# EAGLE board ATTiny Fuse Reset with 12V Charge Pump (EAGLE 7.5.0)
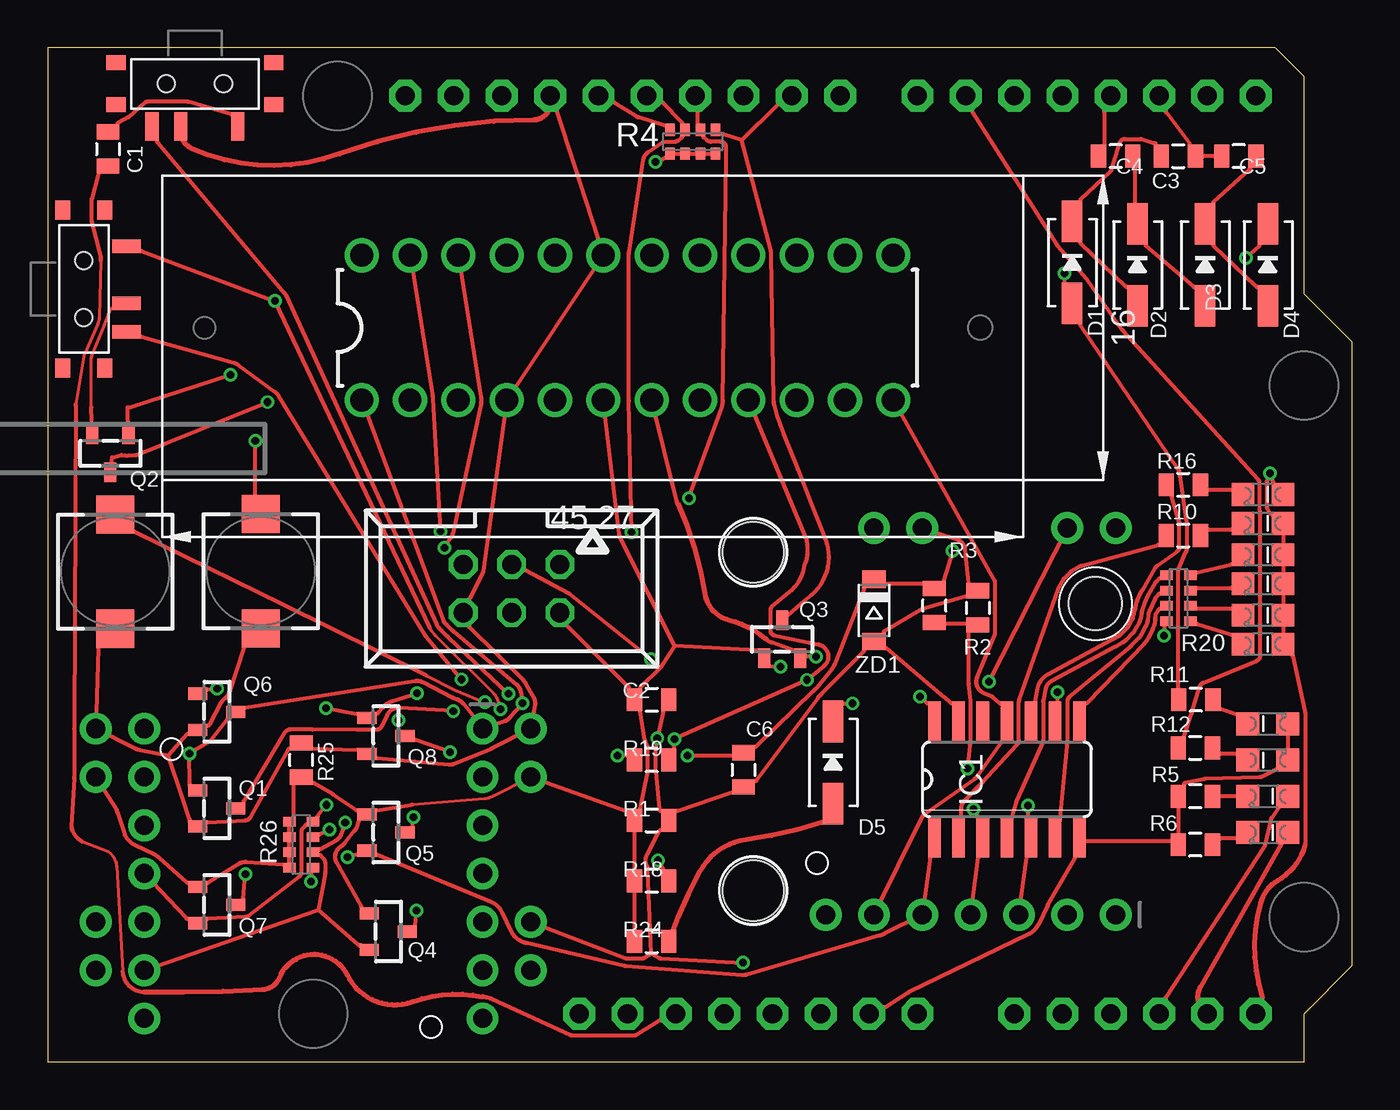
[diagram p0: board, top side]
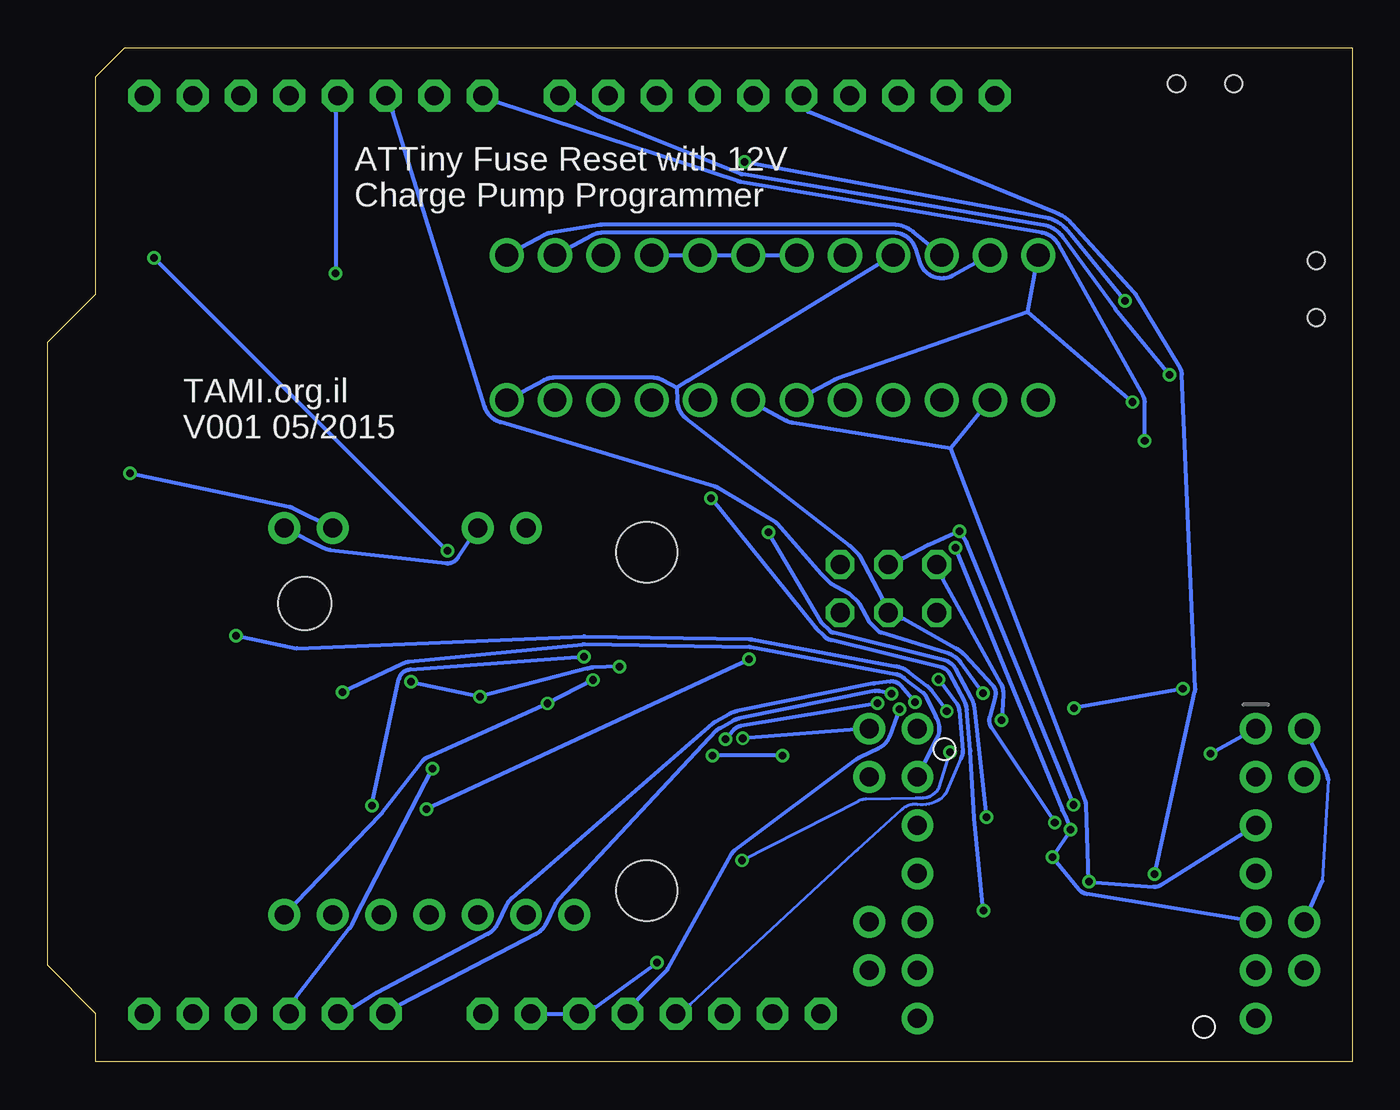
[diagram p1: board, bottom side, seen from below]

Size 68.58 x 53.34 mm. Coordinates in mm from the lower left corner, seen from the top.
Outline: 0,53.34 0,0 66.04,0 66.04,2.54 68.58,5.08 68.58,37.85 66.04,40.39 66.04,51.82 64.52,53.34 0,53.34
Copper layers (1*16): TOP 0.035mm / dielectric 1.5mm / BOTTOM 0.035mm
Design rules "Elecrow_2-layer_eagle_rule": minimum track width 6mil, minimum drill 12mil, track to track 6mil, track to pad 6mil, pad to pad 6mil, via to via 6mil, smd to smd 0mil, copper to edge 10mil, drill to drill 10mil, minimum pad ring 10mil, minimum via ring 6mil, stop-mask expansion 2mil, vias tented up to drill 100mil, thermal gap 10mil
Net classes: 0 default: width 0.152 mm, clearance 0.152 mm
tRestrict: area 34.7,24.4 to 39.5,29.2; area 53.1,22.1 to 57.1,26.1; area 34.9,6.9 to 39.2,11.2
vRestrict: area 34.7,24.4 to 39.5,29.2; area 53.1,22.1 to 57.1,26.1; area 34.9,6.9 to 39.2,11.2

## Footprints (pad centres in the part's own frame; a part is rotated, then mirrored left to right if it is on the bottom)
BREAKOUT_TAMI_NOHOLES = drill 1 pad 1.676: 1.PB5 -10.16,-8.89; 2.PB4 -10.16,-6.35; 3.PB3 -10.16,-3.81; 4.PB2 -10.16,-1.27; 5.PB1 -10.16,1.27; 6.PB0 -10.16,3.81; 7.GND -10.16,6.35; 8.GND 10.16,-8.89; 9.VCC 10.16,-6.35; 10.GND 10.16,1.27; 11.BAT 10.16,3.81
BREAKOUT_ATTAMI = drill 1 pad 1.676: 1.PB5 1.27,1.27; 2.PB4 1.27,3.81; 3.PB3 1.27,6.35; 4.PB2 1.27,8.89; 5.PB1 1.27,11.43; 6.PB0 1.27,13.97; 7.GND 1.27,16.51; 8.GND 21.59,1.27; 9.VCC 21.59,3.81; 10.GND 21.59,11.43; 11.BAT 21.59,13.97 | hole 2.8: 17.628,2.337 | hole 3.2: 20.32,20.32; 2.54,20.32
0805 = smd 0.8 x 1.2: 1 -0.9,0; 2 0.9,0
SOD-323 = smd 2.184 x 1.067: AQ 2.159,0; CQ -2.159,0
LED-805 = smd 1.2 x 1.2: A 0,-1.05; C 0,1.05
SO14 = smd 0.66 x 2.032: 1 -3.81,-3.073; 2 -2.54,-3.073; 3 -1.27,-3.073; 4 0,-3.073; 5 1.27,-3.073; 6 2.54,-3.073; 7 3.81,-3.073; 8 3.81,3.073; 9 2.54,3.073; 10 1.27,3.073; 11 0,3.073; 12 -1.27,3.073; 13 -2.54,3.073; 14 -3.81,3.073
SOT23-R = smd 0.635 x 1.016: 1 -0.95,-1; 2 0.95,-1; 3 0,1
0603-ARV = smd 0.5 x 0.65: 1 -1.2,-0.625; 2 -0.4,-0.625; 3 0.4,-0.625; 4 1.2,-0.625; 5 1.2,0.625; 6 0.4,0.625; 7 -0.4,0.625; 8 -1.2,0.625
PUSHBUTTON_SMD_SJ = smd 2 x 2: P$1 3,0; P$2 -3,0
KPS-1290 = smd 0.7 x 1.5: O -2.25,2.25; P 0.75,2.25; S 2.25,2.25 | smd 1 x 0.8: P$1 -4.15,1.1; P$2 -4.15,-1.1; P$3 4.15,-1.1; P$4 4.15,1.1 | hole 0.9: 1.5,0; -1.5,0
ARDUINOR3-BPLACE = drill 1 pad 1.676 octagon: 3V 35.56,2.54; 5V 38.1,2.54; A0 50.8,2.54; A1 53.34,2.54; A2 55.88,2.54; A3 58.42,2.54; A4 60.96,2.54; A5 63.5,2.54; AREF 23.876,50.8; D0 63.5,50.8; D1 60.96,50.8; D2 58.42,50.8; D3 55.88,50.8; D4 53.34,50.8; D5 50.8,50.8; D6 48.26,50.8; D7 45.72,50.8; D8 41.656,50.8; D9 39.116,50.8; D10 36.576,50.8; D11 34.036,50.8; D12 31.496,50.8; D13 28.956,50.8; GND 26.416,50.8; GND1 43.18,2.54; GND2 40.64,2.54; IOREF 30.48,2.54; RESERVED 27.94,2.54; RESET 33.02,2.54; SCL 18.796,50.8; SDA 21.336,50.8; VIN 45.72,2.54
DIL-24-ZIF = drill 1.2 pad 1.8: P$1 -13.97,-3.81; P$2 -11.43,-3.81; P$3 -8.89,-3.81; P$4 -6.35,-3.81; P$5 -3.81,-3.81; P$6 -1.27,-3.81; P$7 1.27,-3.81; P$8 3.81,-3.81; P$9 6.35,-3.81; P$10 8.89,-3.81; P$11 11.43,-3.81; P$12 13.97,-3.81; P$13 13.97,3.81; P$14 11.43,3.81; P$15 8.89,3.81; P$16 6.35,3.81; P$17 3.81,3.81; P$18 1.27,3.81; P$19 -1.27,3.81; P$20 -3.81,3.81; P$21 -6.35,3.81; P$22 -8.89,3.81; P$23 -11.43,3.81; P$24 -13.97,3.81
057-006-1 = drill 1 pad 1.508 octagon: 1 -2.54,-1.27; 2 -2.54,1.27; 3 0,-1.27; 4 0,1.27; 5 2.54,-1.27; 6 2.54,1.27
SOD-123 = smd 0.91 x 1.22: A 1.635,0; C -1.635,0

## Placement (x,y rotation side)
A1  [BREAKOUT_TAMI_NOHOLES]  12.7,8.64 180 top
A2  [BREAKOUT_ATTAMI]  57.4,6.48 90 top
A3  [BREAKOUT_TAMI_NOHOLES]  15.24,8.64 180 bottom
C1  [0805]  3.17,48.01 270 top
C2  [0805]  31.75,19.05 0 top
C3  [0805]  59.44,47.62 0 top
C4  [0805]  56.13,47.62 180 top
C5  [0805]  62.61,47.62 180 top
C6  [0805]  36.58,15.37 270 top
D1  [SOD-323]  53.85,42.04 270 top
D2  [SOD-323]  57.28,41.91 270 top
D3  [SOD-323]  60.83,41.91 270 top
D4  1N4148  [SOD-323]  64.14,41.91 270 top
D5  [SOD-323]  41.27,15.75 270 top
HBEAT  H.B.  [LED-805]  64.14,15.88 270 top
HV_O  HV  [LED-805]  64.14,17.78 270 top
IC1  [SO14]  50.42,14.86 0 top
ISP  PMD  [LED-805]  64.14,13.97 90 top
ISP_ERR  ERR  [LED-805]  64.14,12.06 90 top
PB0  PB0  [LED-805]  63.88,29.84 90 top
PB1  PB1  [LED-805]  63.88,28.32 90 top
PB2  PB2  [LED-805]  63.88,26.67 90 top
PB3  PB3  [LED-805]  63.88,25.15 90 top
PB4  PB4  [LED-805]  63.88,23.5 90 top
PB5  PB5  [LED-805]  63.88,21.97 90 top
Q1  [SOT23-R]  8.89,13.34 270 top
Q2  [SOT23-R]  3.3,32 180 top
Q3  [SOT23-R]  38.61,22.23 0 top
Q4  [SOT23-R]  17.91,6.86 270 top
Q5  [SOT23-R]  17.78,12.06 270 top
Q6  [SOT23-R]  8.89,18.41 270 top
Q7  [SOT23-R]  8.89,8.26 270 top
Q8  [SOT23-R]  17.78,17.14 270 top
R1  [0805]  31.75,12.7 0 top
R2  [0805]  48.9,23.88 270 top
R3  [0805]  46.61,24 90 top
R4  [0603-ARV]  33.91,48.39 180 top
R5  [0805]  60.33,13.97 180 top
R6  [0805]  60.33,11.43 180 top
R10  [0805]  59.69,27.69 0 top
R11  [0805]  60.35,19.05 180 top
R12  [0805]  60.33,16.51 0 top
R16  [0805]  59.69,30.35 0 top
R18  [0805]  31.75,9.53 180 top
R19  [0805]  31.75,15.88 180 top
R20  [0603-ARV]  59.44,24.38 90 top
R24  [0805]  31.75,6.35 0 top
R25  [0805]  13.34,15.88 90 top
R26  [0603-ARV]  13.34,11.43 90 top
SW1  [PUSHBUTTON_SMD_SJ]  3.56,25.78 270 top
SW2  [PUSHBUTTON_SMD_SJ]  11.2,25.81 270 top
SW3  [KPS-1290]  7.75,51.44 180 top
SW4  SWITCH_SPDT  [KPS-1290]  1.91,40.64 270 top
U1  ARDUINOR3-BPLACE  [ARDUINOR3-BPLACE]  0,0 0 top
U$2  [DIL-24-ZIF]  30.48,38.61 0 top
X1  [057-006-1]  24.38,24.89 180 top
ZD1  [SOD-123]  43.43,23.75 270 top

## Library data of the parts
A1-A3 C1-C6 D1-D5 HBEAT HV_O ISP ISP_ERR PB0 PB1-PB5 R1-R3 R5 R6 R10-R12 R16 R18 R19 R24 R25 U1 = ATtami
IC1 = 74xx-eu
Q1-Q8 SW1 SW2 = microbuilder
R4 R20 R26 = SparkFun-Passives
SW3 SW4 = SparkFun-Electromechanical
U$2 = ATTiny Fuse Reset with 12V Charge Pump
X1 = con-panduit; OC_FARNELL: unknown; OC_NEWARK: unknown
ZD1 = dp_devices

## Nets
11.5V: C6.1 D4.CQ R3.2 R19.2 ZD1.C
ATTINY_VCC: A1.9.VCC A2.9.VCC A3.9.VCC C2.1 IC1.14 PB0.A PB1.A PB2.A PB3.A PB4.A PB5.A Q2.3 Q3.1 Q4.1 Q5.1 Q7.1 R1.1 R18.2 R24.1 R25.1 R26.5 R26.6 R26.7 R26.8 U1.A5 U$2.P$6 U$2.P$24 X1.2
GND: A1.8.GND A1.10.GND A2.8.GND A2.10.GND A3.8.GND A3.10.GND C2.2 C6.2 HBEAT.C HV_O.C IC1.7 IC1.13 Q1.2 Q6.2 Q8.2 R1.2 R2.1 R5.2 R6.2 R25.2 SW1.P$1 SW2.P$1 SW3.P U1.GND U1.GND1 U1.GND2 U$2.P$4 U$2.P$16 U$2.P$17 U$2.P$18 U$2.P$19 X1.6 ZD1.A
HV/RESET: A1.1.PB5 A2.1.PB5 A3.1.PB5 D5.CQ Q1.1 Q6.3 R19.1 U$2.P$1 U$2.P$9
HV_OFF(RESET): Q6.1 Q8.1 U1.D5
HV_SENSE: R2.2 R3.1 U1.A2
ISP_RESET: Q8.3 R18.1 X1.5
N$1: Q2.2 SW4.P
N$2: Q3.3 R4.1 U1.D9
N$3: SW3.S U1.A0
N$4: HV_O.A R11.1
N$5: D5.AQ R24.2
N$6: ISP.C R5.1
N$7: A1.2.PB4 IC1.9
N$8: Q4.3 R4.2 U1.D11
N$9: SW1.P$2 U1.A1
N$10: C3.1 D1.CQ D2.AQ
N$11: C4.1 D2.CQ D3.AQ
N$12: C5.1 D3.CQ D4.AQ
N$13: IC1.10 R16.1
N$14: C1.1 SW3.O
N$15: ISP_ERR.C R6.1
N$16: SW4.S U1.3V
N$17: ISP_ERR.A U1.A4
N$18: ISP.A U1.A3
N$19: R12.1 U1.D6
N$20: HBEAT.A R12.2
N$21: IC1.2 R10.1
N$22: SW2.P$2 U1.D7
N$23: PB2.C R20.4
N$24: IC1.4 R20.5
N$25: PB1.C R10.2
N$26: IC1.6 R20.6
N$27: PB0.C R16.2
N$28: IC1.8 R20.7
N$29: PB3.C R20.3
N$30: PB4.C R20.2
N$31: PB5.C R20.1
N$32: Q1.3 R20.8
N$33: C1.2 U1.RESET
N$34: Q7.3 R4.4 U1.D13
N$36: X1.1
N$37: Q5.3 R4.3 U1.D12
P1: C3.2 C5.2 U1.D2
P2: C4.2 U1.D3
PUMP_VCC: D1.AQ R11.2 U1.D4
SCI: A2.3.PB3 A3.3.PB3 IC1.5 Q3.2 R26.1 U$2.P$2 U$2.P$7
SDI_MOSI: A2.6.PB0 A3.6.PB0 IC1.11 Q4.2 R26.2 U$2.P$12 U$2.P$21 X1.4
SDO-SCK: A2.4.PB2 A3.4.PB2 IC1.3 Q7.2 R26.4 U$2.P$14 U$2.P$23 X1.3
SII-MISO: A2.5.PB1 A3.5.PB1 IC1.1 Q5.2 R26.3 U$2.P$13 U$2.P$22
VCC: R4.5 R4.6 R4.7 R4.8 SW4.O U1.5V
VCC_OFF: Q2.1 U1.D8
VIN: U1.VIN

## Tracks (layer width: path | path; a pad name or v marks a point on that pad's centre or on a via)
11.5V  (via drill 0.4 pad 0.7)
  TOP 0.203: v47.56,26.88 47.11,25.33 arc16 47.11,25.3 47.11,25.2 R3.2 46.11,25.14 46.01,25.14 44.04,25.14 43.94,25.14 ZD1.C 42.93,25.03 42.93,24.93 arc-21 42.92,24.89 41.37,20.93 arc-17 41.21,20.65 40.43,19.68 arc-14 40.32,19.57 40.31,19.56 arc7 40.25,19.51 37.25,16.59 arc-44 37.18,16.57 37.07,16.57 C6.1 36.08,16.11 35.98,16.11 v33.64,16.11 | D4.CQ 63.7,43.08 63.7,42.98 arc-48 63.67,42.9 v62.99,42.28 | R19.2 30.55,16.11 30.45,16.11 v29.95,16.11
  BOTTOM 0.203: v62.99,42.28 v47.56,26.88 | v29.95,16.11 v33.64,16.11
ATTINY_VCC  (via drill 0.4 pad 0.7)
  TOP 0.152: 19.18,13.54 22.95,13.85 arc22 23.37,13.96 A3.9.VCC
  TOP 0.203: 32.97,21.88 32.27,20.81 arc-12 32.18,20.7 31.18,19.72 arc46 31.15,19.65 31.15,19.55 C2.1 | 32.97,21.88 30.11,27.55 arc-20 30.04,27.77 U$2.P$6 | A2.9.VCC v49.47,19.99 | IC1.14 46.38,18.85 46.28,18.85 arc-43 46.21,18.87 v45.85,19.21 | PB0.A 64.43,30.34 64.43,30.45 arc17 64.43,30.47 64.36,30.72 arc15 v64.25,30.95 64.09,30.55 arc23 64.06,30.45 64.06,29.25 arc31 64.1,29.11 64.24,28.87 arc59 64.33,28.82 64.43,28.82 PB1.A PB2.A PB3.A PB4.A PB5.A 65.43,21.47 65.43,21.37 arc13 65.43,21.35 66.08,18.45 arc-13 66.09,18.38 66.09,11.46 arc-16 66.08,11.38 | 32.97,21.88 37.34,21.63 37.44,21.63 Q3.1 37.87,20.82 37.98,20.82 v38.52,20.79 | A1.9.VCC 3.62,13.3 arc-2 3.66,13.15 4.05,11.96 arc39 4.58,11.42 5.58,10.94 arc-16 5.84,10.76 7.31,9.45 arc42 7.38,9.42 7.48,9.42 Q7.1 8.3,9.42 8.4,9.42 arc32 8.45,9.44 10.05,10.43 arc-36 10.44,10.52 12.38,10.38 12.49,10.38 R26.8 R26.7 R26.6 R26.5 12.93,12.78 12.93,14.68 R25.1 13.83,14.68 13.94,14.68 arc-30 13.99,14.66 14.98,14.09 arc-4 15.03,14.06 16.21,13.25 arc34 16.27,13.23 16.37,13.23 Q5.1 | Q4.1 16.5,8.02 16.5,8.13 arc29 16.49,8.18 15.2,10.46 arc-84 15.39,11.32 15.43,11.34 arc16 15.64,11.54 16.16,12.17 arc20 16.26,12.37 16.37,12.66 arc19 16.37,12.7 16.37,12.8 Q5.1 | Q5.1 17.19,13.23 17.29,13.23 arc9 17.3,13.23 19.13,13.53 arc-5 19.18,13.54 | A3.9.VCC 30.42,13.2 arc20 30.45,13.2 30.55,13.2 R1.1 | R24.1 R18.2 R1.1 | R1.1 31.15,13.2 31.15,13.3 arc-12 31.15,13.32 31.54,15.21 arc12 31.55,15.28 31.55,16.48 arc28 31.51,16.62 31.47,16.71 arc-19 31.4,16.91 31.15,18.43 arc-9 31.15,18.45 31.15,18.55 C2.1
  TOP 0.203: X1.2 27.23,23.01 27.31,22.94 30.52,19.72 arc-45 30.55,19.65 30.55,19.55 C2.1 | 63.85,3.38 63.85,3.28 U1.A5 | Q2.3 3.39,31.79 3.87,31.92 arc16 4.66,31.92 v11.57,34.7
  TOP 0.254: 66.08,11.38 arc-44 64.64,9.53 arc44 63.75,8.38 arc34 63.85,3.38
  BOTTOM 0.203: v49.47,19.99 v45.85,19.21 40.21,20.68 arc-6 40.15,20.7 arc19 39.94,20.74 v38.52,20.79 | 17.07,39.43 U$2.P$24 | 17.07,39.43 27.07,35.94 arc-9 27.24,35.86 U$2.P$6 | A2.9.VCC 55.62,29.09 arc-15 55.9,29.18 v64.25,30.95 | v11.57,34.7 17.07,39.43
GND  (via drill 0.4 pad 0.7)
  TOP 0.203: C2.2 32.35,18.55 32.35,18.45 arc-12 32.35,18.43 v32.04,17.02 31.95,16.53 arc10 31.95,16.48 31.95,15.28 arc6 31.95,15.24 32.15,13.29 arc84 32.25,13.2 32.35,13.2 R1.2 | A3.10.GND 30.34,5.46 arc21 30.45,5.45 31.25,5.45 arc32 31.41,5.49 31.72,5.68 | 6.34,16.11 7.31,17.21 arc-49 7.38,17.25 7.48,17.25 Q6.2 8.3,17.68 8.4,17.68 arc61 8.49,17.73 9.12,18.88 arc-16 9.17,18.95 9.38,19.16 arc27 9.54,19.42 10.3,21.77 arc18 10.3,21.81 10.3,21.91 SW2.P$1 | A2.10.GND 47.76,27.5 arc-67 48.22,26.94 48.4,25.19 arc-6 48.4,25.18 48.4,25.07 R2.1 48.4,24.48 48.3,24.48 arc16 48.27,24.47 45.92,23.8 arc15 45.85,23.77 43.99,22.66 arc59 43.94,22.57 43.94,22.47 ZD1.A | U1.GND 26.76,50.06 26.76,49.96 U$2.P$19 U$2.P$4 22.9,25.81 arc-19 22.87,25.71 22.18,24.36 22.17,24.36 22.1,24.29 X1.6 22.16,22.97 22.16,22.87 24.96,20.11 arc-16 25.14,19.88 25.54,19.18 arc-40 25.62,18.74 A3.8.GND 23.37,16.5 arc-4 23.3,16.47 21.39,15.69 arc-27 21.09,15.64 17.3,15.98 17.29,15.98 17.19,15.98 Q8.2 16.37,16.41 16.27,16.41 13.94,16.48 13.83,16.48 R25.2 12.84,16.48 12.73,16.48 arc61 12.65,16.42 10.66,12.87 arc-58 10.41,12.71 8.4,12.6 8.3,12.6 Q1.2 7.48,12.6 7.48,12.7 arc19 7.48,12.73 7.09,13.87 | HV_O.C HBEAT.C 64.69,15.38 64.58,15.38 arc27 64.54,15.37 63.82,15 arc-25 63.7,14.97 60.81,14.88 arc10 60.76,14.87 59.8,14.67 arc78 59.72,14.57 59.72,14.47 R5.2 R6.2 59.13,11.61 54.46,11.61 IC1.7 54,10.87 54,10.77 arc-30 53.99,10.72 52.6,8.32 arc4 52.56,8.24 52.08,7.25 arc-38 51.55,6.72 45.24,3.65 arc6 45.21,3.64 44.02,2.89 43.92,2.89 U1.GND1 | IC1.13 47.65,18.85 47.55,18.85 arc-42 47.48,18.87 47.14,19.18 44.11,21.74 arc40 44.04,21.76 43.94,21.76 ZD1.A
  TOP 0.203: ZD1.A 42.93,21.76 42.93,21.66 arc-45 42.9,21.59 40.67,19.34 arc-8 40.56,19.25 40.56,19.24 arc16 40.5,19.18 37.26,14.81 arc-53 37.18,14.77 37.07,14.77 C6.2 36.08,14.17 35.98,14.17 arc19 35.94,14.16 33.08,13.2 arc-19 33.05,13.2 32.95,13.2 R1.2 | SW1.P$1 2.66,21.88 2.66,21.78 A1.8.GND 4.57,16.5 arc15 4.86,16.41 6.34,16.11 | 7.09,13.87 | 7.09,13.87 6.34,16.11 | 31.72,5.68 31.55,10.14 arc26 31.52,10.27 31.51,10.29 arc-56 31.5,10.9 32.16,12.15 arc-62 32.25,12.2 32.35,12.2 R1.2 | 31.72,5.68 32.11,5.48 arc25 32.23,5.45 v36.56,5.22
  TOP 0.254: U1.GND 26.42,50.42 arc-90 25.53,49.53 arc20 15.37,47.75 arc-43 7.62,48.01 arc-77 SW3.P
  BOTTOM 0.152: 1.27,14.84 1.57,9.52
  BOTTOM 0.203: v36.56,5.22 39.8,2.89 39.9,2.89 U1.GND2 U1.GND1 | A3.8.GND v32.04,17.02 | U$2.P$16 U$2.P$17 U$2.P$18 U$2.P$19 | A2.8.GND 54.11,27.05 arc-20 53.73,26.93 47.64,26.23 arc-63 47.02,26.51 A2.10.GND | A1.10.GND 1.57,9.52 | 1.27,14.84 arc-28 1.52,15.5 A1.8.GND
HV/RESET  (via drill 0.4 pad 0.7)
  TOP 0.203: R19.1 32.95,16.37 v32.95,16.98 v39.92,20.09 40.79,20.81 arc129 40.51,21.95 38.23,22.42 arc-79 37.99,22.72 37.99,23.73 arc-36 38.05,23.91 39.12,24.81 arc6 39.48,25.25 39.64,25.59 arc15 39.78,26.13 arc45 39.78,27.74 U$2.P$9 | D5.CQ 41.71,18.86 v42.31,18.86 | U$2.P$1 20.8,23.2 arc25 20.87,23.09 20.98,22.98 21.3,22.67 21.32,22.65 arc5 21.34,22.64 24.64,19.86 arc-40 24.86,19.47 v24.97,18.86 24.3,18.11 arc-29 24.02,17.92 A1.1.PB5 21.84,18.85 arc33 21.54,19.06 21.39,19.11 arc-8 21.26,19.17 19.71,19.97 arc36 19.31,20.04 10.41,18.63 arc-9 10.4,18.63 10.3,18.63 Q6.3 9.48,18.2 9.48,18.1 arc-37 9.46,18.04 8.64,16.96 arc-21 8.56,16.89 v7.45,16.22 7.48,14.6 7.48,14.5 Q1.1
  BOTTOM 0.203: A2.1.PB5 51.06,13.03 arc-6 51.02,13.08 48.87,15.83 arc28 48.62,16.02 v42.31,18.86 v39.92,20.09 | A3.1.PB5 v7.45,16.22 | v24.97,18.86 32.15,17.66 arc-39 32.54,17.45 v32.95,16.98
HV_OFF(RESET)  (via drill 0.4 pad 0.7)
  TOP 0.203: v14.63,18.6 16.25,18.31 arc10 16.27,18.31 16.37,18.31 Q8.1 17.19,18.31 17.29,18.31 arc49 17.36,18.35 17.64,18.66 arc-31 18.12,18.98 v19.41,19.39 | Q6.1 8.3,19.58 8.4,19.58 8.41,19.58 v8.91,19.62
  BOTTOM 0.203: v8.91,19.62 v14.63,18.6 | v19.41,19.39 20.56,20.98 arc-37 21.32,21.52 24.79,22.58 arc28 24.91,22.65 25.35,23.09 arc17 25.41,23.16 25.9,24.08 arc-17 25.95,24.15 26.4,24.59 arc-17 26.47,24.64 27.38,25.14 arc17 27.45,25.19 27.89,25.63 arc4 27.91,25.65 30.2,28.28 arc-18 30.36,28.41 33.37,30.2 arc-14 33.52,30.27 44.8,33.64 arc56 45.6,34.44 50.43,49.97 arc-28 50.44,49.98 50.51,50.05 U1.D5
HV_SENSE  (via drill 0.4 pad 0.7)
  TOP 0.203: v48.35,15.42 48.51,16.88 arc6 48.51,16.92 48.51,18.95 arc6 48.51,18.98 48.41,19.88 arc-6 48.41,19.99 48.41,22.58 48.41,22.68 R2.2 48.4,23.04 48.3,23.04 47.21,23.04 47.11,23.04 R3.1
  BOTTOM 0.203: U1.A2 55.53,3.28 55.53,3.38 52.69,7.05 arc-12 52.56,7.25 52.08,8.24 arc2 52.07,8.27 v48.35,15.42
ISP_RESET  (via drill 0.4 pad 0.7)
  TOP 0.203: v21.14,16.29 19.32,16.92 arc19 19.29,16.93 19.19,16.93 Q8.3 18.44,17.36 v18.44,17.96 | R18.1 32.35,10.02 32.35,10.12 arc31 32.34,10.18 v32.08,10.6
  BOTTOM 0.152: v32.08,10.6 25.96,13.74 arc23 25.56,13.84 22.95,13.89 arc3 22.61,13.89 arc-68 21.72,14.45 v21.14,16.29
  BOTTOM 0.203: X1.5 21.53,25.51 21.53,25.41 18.48,19.9 arc33 18.35,19.32 v18.44,17.96
N$1
  TOP 0.152: 2.3,34.43 2.3,36.99 arc-22 2.32,37.11 2.98,38.7 arc2 2.99,38.73 3.31,39.58 arc-69 3.4,39.64 3.51,39.64 SW4.P
  TOP 0.203: Q2.2 2.3,34.43
N$2
  TOP 0.203: 36.49,48.48 38,42.72 arc-14 38.03,42.44 38.16,34.78 arc13 38.2,34.52 arc8 38.68,32.99 arc0 40.87,27.51 arc-71 40.13,24.54 arc0 Q3.3 | 36.49,48.48 35.56,48.76 arc17 35.36,48.79 35.26,48.79 R4.1 | 36.49,48.48 38.39,50.34 38.46,50.42 U1.D9
N$3  (via drill 0.4 pad 0.7)
  TOP 0.203: SW3.S 5.75,48.54 5.75,48.44 arc40 5.77,48.37 12.45,40.43 arc-15 12.54,40.28 20.44,23.01 arc20 20.59,22.81 20.7,22.7 | 20.7,22.7 | 20.7,22.7 21.01,22.38 21.03,22.36 arc2 21.04,22.35 v24.22,19.36
  BOTTOM 0.203: v24.22,19.36 24.82,19.5 arc-24 25.1,19.5 32.25,18.06 arc-18 32.56,17.94 33.26,17.55 arc-18 33.42,17.42 41.73,8.53 arc-17 41.92,8.24 42.41,7.25 arc37 42.91,6.73 50.07,3 50.14,2.92 U1.A0
N$4
  TOP 0.203: HV_O.A 62.59,18.28 62.48,18.28 arc-19 62.45,18.28 61.68,18.55 arc19 61.65,18.55 61.55,18.55 R11.1
N$5
  TOP 0.203: D5.AQ 40.84,12.6 40.74,12.6 arc18 40.71,12.59
  TOP 0.254: 40.71,12.59 arc-10 36.7,11.68 arc53 34.29,10.03 arc10 R24.2
N$6
  TOP 0.203: ISP.C 62.59,13.97 62.48,13.97 61.62,13.97 61.52,13.97 R5.1
N$7  (via drill 0.4 pad 0.7)
  TOP 0.203: IC1.9 53.08,18.85 53.08,18.95 v53.08,19.45
  BOTTOM 0.203: v53.08,19.45 49.92,20.95 arc20 49.58,21.05 40.44,21.96 arc7 40.37,21.97 31.71,21.82 arc10 31.6,21.81 24.02,20.4 arc27 23.57,20.2 22.58,19.43 arc27 22.39,19.19 21.91,18.17 arc-6 21.88,18.11 | 21.88,18.11 | 21.88,18.11 arc58 21.84,17.01 A1.2.PB4
N$8  (via drill 0.4 pad 0.7)
  TOP 0.203: v33.7,29.64 35.42,34.39 arc19 35.49,34.78 35.66,47.43 35.66,47.44 35.66,47.98 arc3 35.66,48 35.66,48.1 arc87 35.36,48.39 34.86,48.39 arc-41 34.66,48.46 34.49,48.61 arc-49 34.46,48.69 34.46,48.79 R4.2 34.17,49.23 34.17,49.34 34.17,49.96 34.17,50.06 U1.D11 | Q4.3 19.31,7.07 19.31,7.18 arc-6 19.31,7.19 v19.39,7.96
  BOTTOM 0.203: v19.39,7.96 19.88,12.82 arc3 19.89,12.85 20.09,16.35 arc-1 20.09,16.38 20.26,18.53 arc-23 20.38,18.95 21.17,20.42 arc-48 21.59,20.75 27.41,22.18 arc31 27.74,22.36 28.18,22.81 arc6 28.23,22.86 v33.7,29.64
N$9  (via drill 0.4 pad 0.7)
  TOP 0.152: 19.9,20.33 21.45,19.53 arc8 21.53,19.5 21.67,19.45 arc-3 21.72,19.43 v22.98,18.91
  TOP 0.203: SW1.P$2 4.45,27.88 4.56,27.88 arc-26 4.6,27.87 12.34,24.08 19.88,20.34 arc-1 19.9,20.33
  BOTTOM 0.203: v22.98,18.91 23.72,19.78 arc-57 24.3,20.01 25.1,19.91 arc-5 25.18,19.9 32.33,18.45 arc-18 32.76,18.3 33.46,17.9 arc-12 33.64,17.78 44.18,8.61 arc-23 44.46,8.24 44.95,7.25 arc36 45.44,6.74 51.29,3.65 arc-4 51.31,3.64 52.5,2.89 52.6,2.89 U1.A1
N$10
  TOP 0.203: D2.AQ 56.84,40.74 56.74,40.74 arc-44 56.67,40.77 54.31,43.03 arc-46 54.28,43.1 54.28,43.2 D1.CQ 54.28,45.19 54.28,45.29 arc-47 54.31,45.36 55.84,46.8 arc30 55.93,46.94 56.34,48.31 arc-73 56.63,48.53 57.43,48.53 arc-17 57.52,48.52 58.16,48.32 arc-73 58.24,48.23 58.24,48.12 C3.1
N$11
  TOP 0.203: D3.AQ 60.4,40.74 60.3,40.74 arc-41 60.23,40.77 57.74,42.9 arc-49 57.71,42.98 57.71,43.08 D2.CQ 57.16,45.06 57.16,45.16 57.16,47.02 57.16,47.13 C4.1
N$12
  TOP 0.203: D4.AQ 63.7,40.74 63.6,40.74 arc-44 63.53,40.77 61.3,42.9 arc-46 61.27,42.98 61.27,43.08 D3.CQ 61.27,45.06 61.27,45.16 arc-48 61.3,45.24 63.18,46.95 arc48 63.21,47.02 63.21,47.13 C5.1
N$13
  TOP 0.203: IC1.10 51.92,18.85 51.92,18.95 arc-11 51.93,19.08 52.04,19.65 arc-51 52.58,20.38 55.9,22.18 56.34,22.44 56.36,22.45 arc15 56.38,22.46 56.75,22.83 arc15 56.76,22.85 57.02,23.29 57.03,23.31 arc15 57.04,23.33 57.09,23.55 | 57.09,23.55 | 57.09,23.55 57.16,23.79 57.16,23.82 57.17,23.82 57.17,23.84 arc9 57.17,23.85 57.18,23.89 arc-17 57.28,24.26 57.46,24.68 arc-7 57.52,24.8 58.22,25.99 arc-24 58.31,26.08 59.37,26.84 arc54 59.49,27.09 59.49,28.29 arc16 59.48,28.37 59.09,29.73 arc-16 59.09,29.75 59.09,29.86 R16.1
N$14
  TOP 0.203: SW3.O 9.75,49.83 9.65,49.83 arc-10 9.63,49.84 7.4,50.49 arc10 7.35,50.49 5.27,50.49 arc35 5.1,50.44 4.27,49.69 arc-8 4.24,49.66 3.73,49.4 arc62 3.67,49.31 3.67,49.2 C1.1
N$15
  TOP 0.203: ISP_ERR.C 62.59,11.75 62.48,11.75 61.62,11.75 61.52,11.75 R6.1
N$16  (via drill 0.4 pad 0.7)
  TOP 0.203: SW4.S 4.8,38.14 4.91,38.14 arc-16 4.93,38.14 9.79,36.77 arc-21 10,36.67 11.96,35.23 arc-22 12.13,35.04 19.79,22.52 arc8 19.91,22.34 v21.75,20.11
  BOTTOM 0.152: 20.58,15.96 21.37,14.11 arc59 22.86,13.54 arc-51 23.71,13.26 26.02,11.14 arc-7 26.23,10.98 34.83,3
  BOTTOM 0.203: v21.75,20.11 20.8,18.84 arc32 20.67,18.5 20.49,16.35 arc36 20.58,15.96 | 34.83,3 34.9,2.92 U1.3V
N$17
  TOP 0.254: ISP_ERR.A 60.58,3.94 arc90 U1.A4
N$18
  TOP 0.203: ISP.A 64.69,13.47 64.69,13.37 arc-35 64.67,13.31 64.34,12.84 arc22 64.29,12.73 63.98,11.4 arc-20 63.94,11.3 58.77,3.38 58.77,3.28 U1.A3
N$19
  TOP 0.203: R12.1 59.72,17.01 59.72,17.11 arc-19 59.73,17.14 60.14,18.35 arc2 60.14,18.36 60.56,19.74 arc-51 60.73,19.93 63.55,21.09 arc68 63.74,21.37 63.74,28.82 arc6 63.73,28.85 63.7,29.18 arc-6 63.7,29.25 63.7,30.45 arc42 63.63,30.62 56.52,38.45 arc-7 56.49,38.48 54.63,41.15 arc6 54.61,41.17 53.09,42.9 arc-9 53.06,42.94 48.61,49.96 48.61,50.06 U1.D6
N$20
  TOP 0.203: HBEAT.A 62.59,16.19 62.48,16.19 61.62,16.19 61.52,16.19 R12.2
N$21
  TOP 0.203: IC1.2 48.02,12.7 48.02,12.8 48.02,13.3 arc-44 48.21,13.76 49.11,14.68 arc2 49.14,14.71 50.97,16.71 arc43 51.05,16.92 51.05,18.95 arc-19 51.07,19.05 53.14,24.93 arc-11 53.14,24.94 53.41,25.4 arc-15 53.42,25.42 53.79,25.79 arc-15 53.81,25.8 53.83,25.82 54.27,26.07 arc-15 54.29,26.08 54.31,26.08 | 54.31,26.08 | 54.31,26.08 58.36,27.18 arc-15 58.39,27.19 58.49,27.19 R10.1
N$22  (via drill 0.4 pad 0.7)
  TOP 0.203: SW2.P$2 10.92,29.7 10.92,29.81 v10.92,32.67
  BOTTOM 0.203: v10.92,32.67 10.91,34.7 arc-29 11,35.02 15.46,43.01 arc-51 16.31,43.61 32.13,46.27 arc9 32.28,46.31 44.88,50.45 44.98,50.45 U1.D7
N$23
  TOP 0.203: R20.4 60.28,25.73 60.39,25.73 arc14 60.41,25.73 62.21,26.17 arc-14 62.23,26.17 62.33,26.17 PB2.C
N$24
  TOP 0.203: R20.5 58.59,25.44 58.49,25.44 arc47 58.41,25.4 58.26,25.24 arc12 58.22,25.19 57.87,24.59 arc7 57.84,24.52 57.65,24.1 arc5 57.62,24.02 57.54,23.79 arc3 57.52,23.72 57.52,23.7 arc4 57.5,23.63 57.42,23.24 arc-19 57.37,23.09 57.12,22.65 arc-15 57.03,22.55 56.66,22.18 arc-15 56.56,22.1 56.54,22.09 56.11,21.83 arc-2 56.09,21.83 52.77,20.03 arc51 52.44,19.57 52.33,19.01 arc11 52.32,18.95 52.32,16.92 arc-24 52.3,16.79 50.93,13.75 arc7 50.9,13.67 50.65,12.83 arc17 50.65,12.8 50.65,12.7 IC1.4
N$25
  TOP 0.203: R10.2 60.89,28 60.99,28 62.23,28 62.33,28 PB1.C
N$26
  TOP 0.203: R20.6 58.59,24.64 58.49,24.64 arc47 58.41,24.6 58.26,24.44 arc18 58.21,24.36 57.91,23.7 arc18 57.85,23.51 57.82,23.23 arc-22 57.72,22.91 57.48,22.47 arc-17 57.32,22.26 56.95,21.89 arc-5 56.89,21.83 53.7,19.18 arc50 53.59,18.95 53.59,16.92 arc-6 53.59,16.89 53.19,12.81 arc6 53.19,12.8 53.19,12.7 IC1.6
N$27
  TOP 0.203: R16.2 60.89,30.1 60.99,30.1 62.23,30.1 62.33,30.1 PB0.C
N$28
  TOP 0.203: R20.7 58.59,23.84 58.49,23.84 arc56 58.4,23.79 58.26,23.58 arc30 58.22,23.45 58.21,23.35 arc3 58.21,23.34 58.21,23.33 arc-25 58.08,22.78 57.87,22.33 arc-18 57.63,21.99 54.63,18.88 arc-46 54.56,18.85 54.46,18.85 IC1.8
N$29
  TOP 0.203: R20.3 60.28,24.93 60.39,24.93 62.23,24.93 62.33,24.93 PB3.C
N$30
  TOP 0.203: R20.2 60.28,23.84 60.39,23.84 62.23,23.84 62.33,23.84 PB4.C
N$31
  TOP 0.203: R20.1 60.28,23.04 60.39,23.04 arc-17 60.42,23.03 62.2,22.47 arc17 62.23,22.47 62.33,22.47 PB5.C
N$32  (via drill 0.4 pad 0.7)
  TOP 0.203: v21.32,18.45 18.48,18.62 arc68 17.85,18.25 17.56,17.65 arc-64 17.29,17.47 16.27,17.47 13.94,17.48 12.73,17.48 arc59 12.47,17.33 10.31,13.7 arc31 10.3,13.65 10.3,13.55 Q1.3 | R20.8 58.68,23.04 58.68,22.93 v58.68,22.42
  BOTTOM 0.203: v58.68,22.42 55.48,21.75 40.38,22.38 arc1 40.36,22.38 31.71,22.23 arc10 31.53,22.21 23.95,20.8 arc27 23.32,20.52 22.33,19.75 arc16 22.13,19.54 v21.32,18.45
N$33
  TOP 0.152: 2.79,42.14 2.71,39.12 arc-22 2.63,38.8 1.95,37.26 arc13 1.9,37.11 1.48,34.58 | 1.82,11.59 3.19,11.06 arc-51 3.63,10.28 3.94,4.75
  TOP 0.203: C1.2 2.68,46.81 2.68,46.71 arc-15 2.67,46.68 2.31,45.37 arc15 2.3,45.29 2.3,44.29 arc10 2.31,44.24 2.78,42.4 arc-10 2.79,42.14 | 1.48,34.58 arc9 1.48,34.53 1.4,17.53 1.4,14.99 arc3 1.4,14.94 1.25,12.4 arc53 1.82,11.59 | 3.94,4.75 arc85 5.06,3.68 | 22.88,3.43 arc-24 23.34,3.32 27.46,1.43 arc25 27.59,1.4 30.83,1.4 arc32 30.99,1.44 32.18,2.19 32.28,2.19 U1.RESET
  TOP 0.254: 5.06,3.68 arc4 11.3,3.81 arc65 12.19,4.45 arc-132 15.75,4.57 arc83 19.18,3.17 arc-31 22.88,3.43
N$34  (via drill 0.4 pad 0.7)
  TOP 0.203: Q7.3 10.3,8.47 10.3,8.57 10.3,8.58 v10.39,9.87 | R4.4 32.56,49.23 32.46,49.23 arc-17 32.43,49.24 31.06,49.67 arc-15 30.99,49.7 29.79,50.45 29.69,50.45 U1.D13
  BOTTOM 0.203: v10.39,9.87 8.28,19.48 arc-15 8.26,19.65 8.96,36.17 arc-29 9.05,36.48 11.39,40.35 arc-11 11.46,40.45 14.71,44.05 arc-26 15.6,44.66 28.6,49.96 arc23 28.61,49.96 28.61,50.06 U1.D13
N$37  (via drill 0.4 pad 0.7)
  TOP 0.203: v30.69,27.85 30.55,34.77 arc-1 30.55,34.8 30.55,42.42 arc-9 30.56,42.6 31.31,47.42 arc-47 31.59,47.86 32.29,48.34 arc-34 32.46,48.39 32.96,48.39 arc41 33.16,48.46 33.33,48.61 arc49 33.36,48.69 33.36,48.79 R4.3 33.36,49.23 33.36,49.34 arc44 33.33,49.41 32.33,50.45 32.23,50.45 U1.D12 | Q5.3 19.19,12.28 19.19,12.38 v19.23,12.88
  BOTTOM 0.203: v19.23,12.88 19.86,18.61 arc-22 20.02,19.14 20.81,20.61 arc-48 21.5,21.15 27.31,22.57 arc31 27.45,22.65 27.89,23.09 arc15 27.94,23.16 v30.69,27.85
P1
  TOP 0.203: U1.D2 58.77,50.06 58.77,49.96 60.02,48.29 arc-37 60.04,48.23 60.04,48.12 C3.2 60.63,47.62 60.74,47.62 61.31,47.62 61.41,47.62 C5.2
P2
  TOP 0.203: U1.D3 55.53,50.06 55.53,49.96 55.53,48.23 55.53,48.12 C4.2
PUMP_VCC  (via drill 0.4 pad 0.7)
  TOP 0.203: R11.2 59.44,19.55 59.44,19.65 59.44,25.83 arc-24 59.46,25.95 59.83,26.81 arc24 59.89,27.09 59.89,28.29 arc9 59.88,28.39 59.49,31 arc26 59.44,31.12 54.3,38.73 arc-34 54.28,38.79 54.28,38.89 D1.AQ 53.44,40.87 53.44,40.97 v53.44,41.47
  BOTTOM 0.203: U1.D4 53.44,50.06 53.44,49.96 v53.44,41.47
SCI  (via drill 0.4 pad 0.7)
  TOP 0.203: R26.1 13.85,10.08 v13.85,9.48 | A2.3.PB3 51.46,10.76 arc8 51.46,10.77 51.46,10.87 IC1.5 51.53,12.7 v51.53,13.48 | v40.38,21.31 39.77,21.31 Q3.2 39.34,21.63 39.24,21.63 arc-20 39.21,21.64 38.05,22.05 arc-29 37.76,22.25 | 33.11,29.36 arc-11 33.07,29.48 U$2.P$7
  TOP 0.254: 33.11,29.36 arc-17 34.54,24.64 arc67 35.81,23.24 arc-26 37.76,22.25
  BOTTOM 0.203: 21.1,32.27 14.04,13.75 arc19 14,13.54 v13.85,9.48 10.44,9.22 arc-37 10.04,9.31 A3.3.PB3 | v51.53,13.48 50.11,20.13 arc74 49.52,20.64 v40.38,21.31 | U$2.P$7 29.78,33.74 arc-19 29.4,33.61 21.1,32.27 | U$2.P$2 21.1,32.27
SDI_MOSI  (via drill 0.4 pad 0.7)
  TOP 0.203: 14.23,8 14.5,9.35 arc2 14.5,9.38 14.59,9.93 arc9 14.59,9.98 14.59,10.48 arc43 14.51,10.69 14.36,10.85 arc47 14.29,10.88 14.18,10.88 R26.2 14.18,11.18 14.29,11.18 arc29 14.33,11.19 15.14,11.64 arc41 15.43,11.99 v15.65,12.59 | A3.6.PB0 14.23,8 | A2.6.PB0 46.01,12.94 arc-29 46.1,13.05 48.73,14.89 arc20 48.89,15.04 50.17,16.86 arc35 50.19,16.92 50.19,17.02 IC1.11 50.19,18.85 50.09,18.85 arc-42 50.02,18.87 49.68,19.18 arc19 49.6,19.23 49.22,19.39 arc-90 48.86,20.24 49.78,22.46 arc22 49.8,22.58 49.8,25.18 arc29 49.76,25.32 U$2.P$12 | Q4.2 16.5,6.12 16.4,6.12 arc-41 16.33,6.15 14.23,8
  BOTTOM 0.203: U$2.P$21 34.92,35.83 34.92,35.82 35.52,35.46 | U$2.P$12 42.48,35.86 arc28 41.91,36 36.83,36 arc28 36.26,35.86 35.52,35.46 | 35.52,35.46 35.49,34.76 arc-50 35.03,33.85 26.43,27.16 arc7 26.4,27.13 25.95,26.69 arc17 25.9,26.62 24.72,24.36 24.71,24.36 24.64,24.29 X1.4 23.73,23.31 23.63,23.31 20.84,21.75 arc18 20.38,21.39 18.93,19.83 arc58 18.78,19.22 19.07,18.14 arc-49 18.99,17.6 v15.65,12.59
SDO-SCK  (via drill 0.4 pad 0.7)
  TOP 0.203: U$2.P$23 20.24,34.99 arc-6 20.25,34.87 v20.64,27.91 | v14.66,13.52 14.21,12.94 arc38 14.18,12.88 14.18,12.78 R26.4 13.74,12.48 13.63,12.48 arc49 13.56,12.45 13.41,12.28 arc41 13.34,12.08 13.34,9.98 arc-52 13.22,9.74 10.59,7.7 arc-35 10.41,7.63 8.4,7.52 8.3,7.52 Q7.2 7.48,7.52 7.38,7.52 arc-47 7.31,7.55 A3.4.PB2 | A2.4.PB2 48.92,10.76 arc8 48.92,10.77 48.92,10.87 IC1.3 48.92,12.7 48.92,12.8 arc28 48.91,12.85 v48.67,13.3 | v31.72,21.17 27.43,24.61 arc10 27.38,24.64 25.14,25.85 25.04,25.85 X1.3
  BOTTOM 0.203: v14.66,13.52 20.26,27.28 arc-10 20.31,27.38 v20.64,27.91 22.28,27.2 arc-4 22.3,27.18 23.63,26.47 23.73,26.47 X1.3 | v48.67,13.3 v31.72,21.17 | U$2.P$14 39.94,43.48 arc28 39.37,43.62 24.13,43.62 arc72 22.99,42.8 22.73,42.04 arc-100 21.02,41.36 U$2.P$23
SII-MISO  (via drill 0.4 pad 0.7)
  TOP 0.203: R26.3 14.18,11.98 14.29,11.98 arc24 14.33,11.99 v14.82,12.21 | U$2.P$22 22.78,34.99 arc-21 22.77,34.54 21.28,27.77 arc-20 21.2,27.57 v20.87,27.04 | IC1.1 46.38,10.87 46.38,10.77 arc-8 46.38,10.76 A2.5.PB1 43.95,6.73 arc-10 43.76,6.65 36.74,4.59 arc-21 36.51,4.57 30.39,5.04 arc-9 30.29,5.06 25.14,6.25 arc-51 24.37,6.87 23.89,7.86 arc42 23.3,8.42 17.33,10.89 arc22 17.29,10.9 17.19,10.9 Q5.2 16.37,10.9 16.27,10.9 arc14 16.25,10.9 v15.77,10.78
  BOTTOM 0.203: v20.87,27.04 15.26,13.27 arc-6 15.24,13.21 15.07,12.89 arc8 15.03,12.8 v14.82,12.21 v15.77,10.78 14.36,9.06 arc-41 13.96,8.83 A3.5.PB1 | U$2.P$22 23.11,43.66 arc-39 24.13,44.03 39.37,44.03 arc-9 39.63,44.01 42.1,43.61 arc-19 42.48,43.48 U$2.P$13
VCC  (via drill 0.4 pad 0.7)
  TOP 0.152: 20.08,22.83 arc20 20.3,22.52 20.41,22.41 23.45,19.37 arc-25 23.6,19.13 v23.81,18.54
  TOP 0.203: SW4.O 4.8,42.64 4.91,42.64 arc-20 4.94,42.63 v11.95,40.01 20.08,22.83 | v31.95,47.32 32.42,47.53 arc-25 32.46,47.54 32.56,47.54 R4.5 32.86,47.76 32.96,47.76 33.26,47.76 33.36,47.76 R4.6 33.66,47.76 33.76,47.76 34.06,47.76 34.16,47.76 R4.7 34.46,47.76 34.56,47.76 34.86,47.76 34.96,47.76 R4.8
  BOTTOM 0.203: v11.95,40.01 14.95,43.69 arc-40 16.14,44.4 v31.95,47.32 | v23.81,18.54 24.33,17.13 arc44 24.9,16.5 25.9,16.02 arc-11 26.08,15.9 32.48,11.12 arc-24 32.66,10.92 35.99,4.9 arc16 36.1,4.76 37.61,3.24 37.69,3.17 U1.5V
VCC_OFF  (via drill 0.4 pad 0.7)
  TOP 0.203: Q2.1 4.21,34.43 4.32,34.43 arc18 4.35,34.43 v9.62,36.14
  BOTTOM 0.203: v9.62,36.14 12.45,39.6 arc3 12.48,39.63 15.21,43.37 arc-44 16.24,44.01 32.06,46.67 arc12 32.2,46.71 39.58,49.68 arc10 39.62,49.7 40.82,50.45 40.92,50.45 U1.D8

## Text on the board
bNames: ATTiny Fuse Reset with 12V / Charge Pump Programmer | TAMI.org.il / V001 05/2015
Name: HV | ISP | 5V | 3v3 | TAMI ATtiny / HV / ISP / Programmer | PB0 | PB1 | PB2 | PB3 | load | ISP | PB4 | PB5 | test | HV | H.B. | prog | ERR